# Altium PCB PCB1.PcbDoc
Units mil, origin at the board's own origin, x right, y up, seen from the top; angles counter-clockwise.
Board outline 6000 x 4000 mil, 2 copper layers (Top Layer, Bottom Layer); 11 components, 6 nets, 30 pads, 0 vias.
Unrouted connection lines stored in the file: 22.
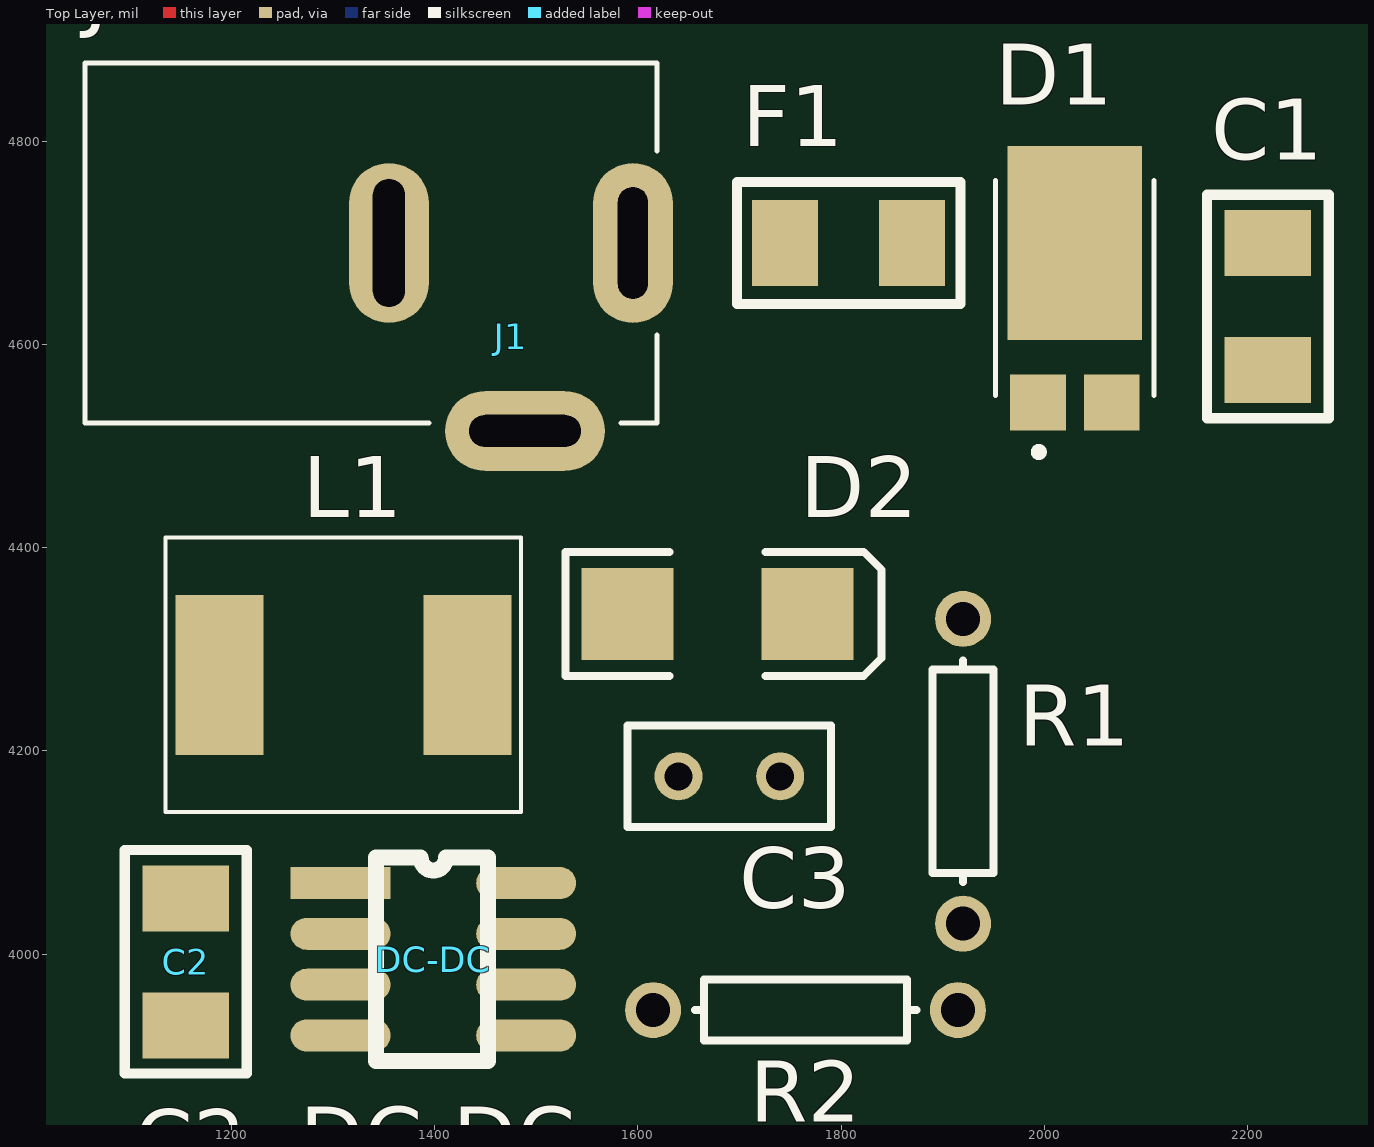
[diagram p0: Top Layer view]
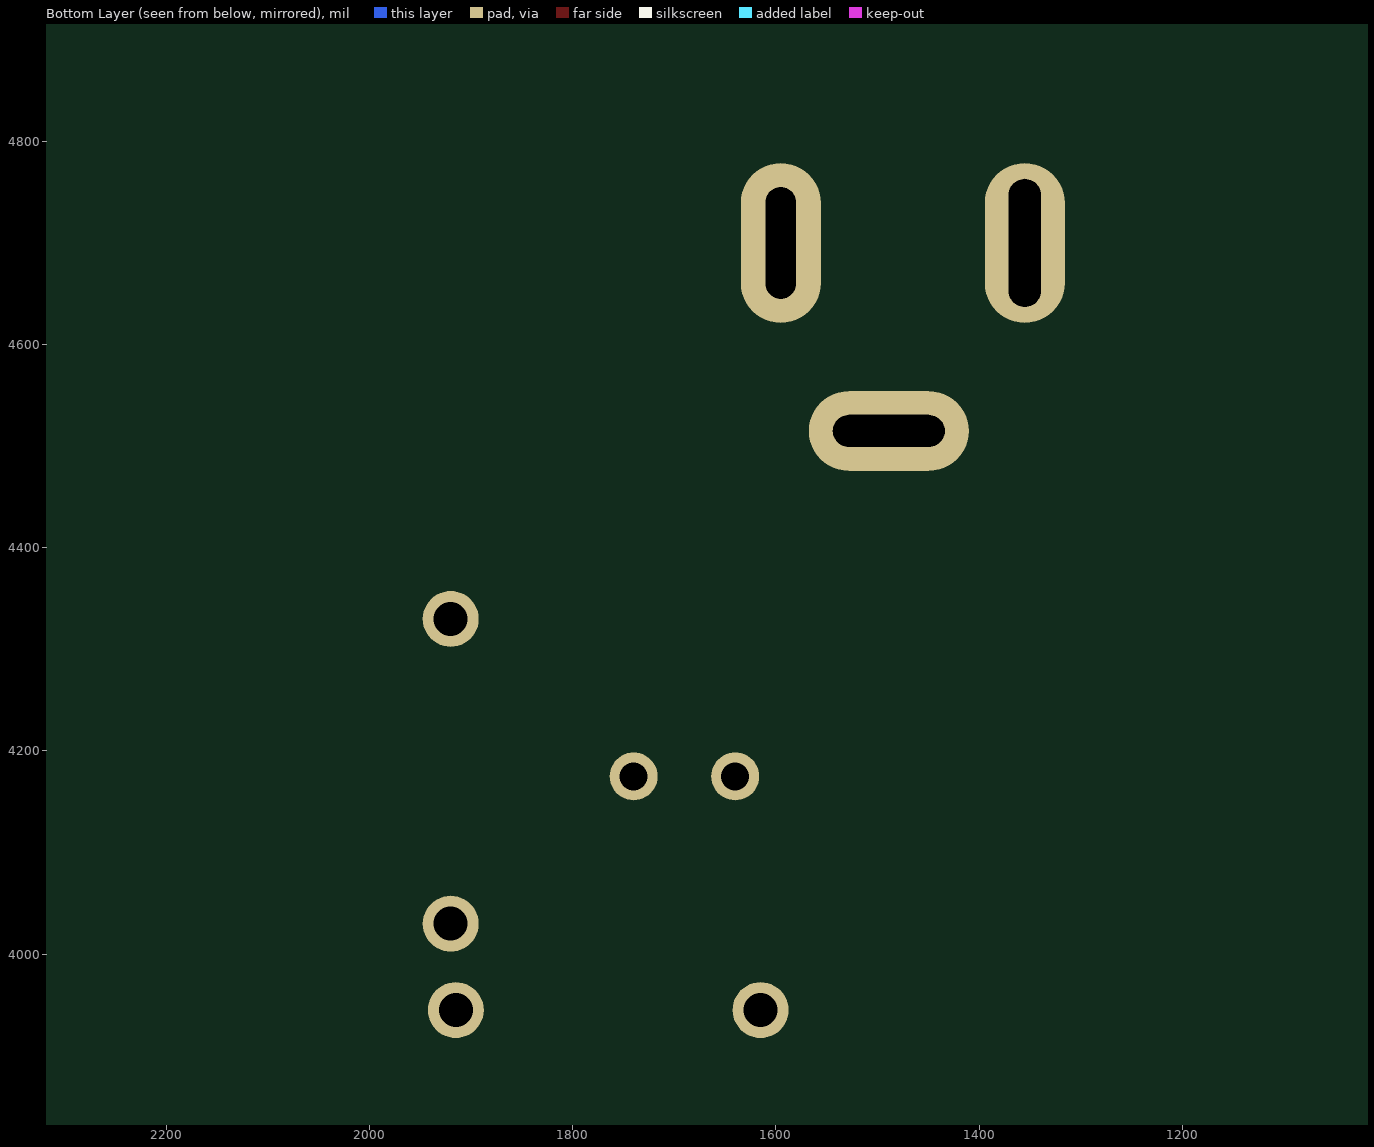
[diagram p1: Bottom Layer view, seen from below]

## Layer stack, top to bottom
Top Solder: solder mask 0.4, Solder Resist, Dk 3.5
Top Layer: signal copper 1.4
Dielectric 1: dielectric 12.6, FR-4, Dk 4.8
Bottom Layer: signal copper 1.4
Bottom Solder: solder mask 0.4, Solder Resist, Dk 3.5

## Board outline
1000,1000 7000,1000 7000,5000 1000,5000

## Design rules (kind name [scope] priority, off if disabled: settings)
Clearance [All] p1: gap=10 ignorepadtopadclearanceinfootprint=FALSE except(0: Arc-Hole Track-Hole SMDPad-Hole THPad-Hole Via-Hole Fill-Hole Poly-Hole Region-Hole Text-Hole)
PolygonConnect [All] p1: connectstyle=Relief reliefconductorwidth=10 reliefentries=4 polygonreliefangle="90 Angle" airgapwidth=10
RoutingVias [All] p1: holewidth=28 width=50 viastyle="Through Hole" minholewidth=28 minwidth=50 maxholewidth=28 maxwidth=50
SolderMaskExpansion [All] p1: expansion=4
Width Width_1 [(InNet('27V') OR InNet('GND') OR InNet('VCC'))] p1: maxlimit=35 minlimit=15 preferedwidth=25 minimp=50.000000 maximp=50.000000 favimp=50.000000
Width [All] p2: maxlimit=10 minlimit=10 preferedwidth=10
30 further rules are at their usual default settings.

## Components (designator, comment, footprint, x,y, rotation, side; value= is the part's Value field where it differs from the comment)
C1 "Cap" 1206 2220,4637.5 r90 top value=47uF
C2 "Cap" 1206 1155,3992.5 r90 top value=47uF
C3 "Leaded Cap" RAD-0.1 1690,4175 r0 top value=100pF
D1 "Diode" PowerDi5 2030,4655.67 r0 top
D2 "Schottky" SMB 1678.58,4335 r0 top
DC-DC "XL6001E1" SOP8 1307.32,4070 r0 top
F1 "SMD Fuse" 1206 1807.5,4700 r0 top
J1 "DC-005" NINIGI_DC-005 1488.86,4700 r0 top
L1 "BCIHP0730" 7x7 1310,4275 r0 top (schematic designator L)
R1 "Res1" AXIAL-0.3 1920,4180 r90 top value=150K
R2 "Res1" AXIAL-0.3 1765,3945 r0 top value=1.2K

## Footprints (in the part's own frame and the unit in brackets; to place one, negate y for a bottom-side part, rotate by r counter-clockwise, add the part's x,y. Pads: shape width x height; smd on the part's side, far side on the other; paste and mask are expansions set on the pad)
7x7 [mm]
  rect 2.2x4 smd: 1(-3.1,0) 2(3.1,0)
  silkscreen extent -4.44,-3.43 4.44,3.43
1206 [mil]
  rect 65x85 smd: 1(-62.5,0) 2(62.5,0)
  silkscreen extent -110,-60 110,60
AXIAL-0.3 [mm] "Axial Device, Thru-Hole; 2 Leads; 0.3 in Pin Spacing"
  round 1.4 hole 0.85: 1(-3.81,0) 2(3.81,0)
  silkscreen extent -2.77,-0.76 2.77,0.76
NINIGI_DC-005 [mm]
  oval 2x4 hole 0.75 slot 2.794 at 90 deg: 2(2.7,0)
  oval 4x2 hole 0.8 slot 2.794 at 0 deg: 4(0,-4.7)
  oval 2x4 hole 0.801 slot 3.2 at 90 deg: 5(-3.4,0)
  silkscreen extent -11,-4.5 3.3,4.5
PowerDi5 [mm]
  rect 1.39x1.4 smd: 1(-0.92,-2.856) 2(0.92,-2.856)
  rect 3.36x4.86 smd: 3(0,1.126)
  silkscreen extent -1.98,-4.2 1.98,2.69
RAD-0.1 [mm] "Radial Cap, Thru-Hole; 2 Leads; 0.1 in Pin Spacing"
  round 1.2 hole 0.7: 1(-1.27,0) 2(1.27,0)
  silkscreen extent -2.54,-1.27 2.54,1.27
SMB [mm] "DO-214-AA/SMB; 2 C-Bend Leads; Body 5.3 x 3.6 mm, inc. leads (LxW)"
  rect 2.3x2.3 smd: 1(-2.25,0) 2(2.25,0)
  silkscreen extent -3.8,-1.55 4.1,1.55
SOP8 [mm]
  rect 2.5x0.8 smd: 1(0,0)
  oval 2.5x0.8 smd: 2(0,-1.27) 3(0,-2.54) 4(0,-3.81) 5(4.64,-3.81) 6(4.64,-2.54) 7(4.64,-1.27) 8(4.64,0)
  silkscreen extent 0.89,-4.44 3.68,0.64

## Part data
D2: library part "D Schottky", "Schottky Diode", Code_JEDEC=DO-214-AA, LatestRevisionDate=17-Jul-2002, LatestRevisionNote="Re-released for DXP Platform.", PackageDescription="DO-214-AA/SMB; 2 C-Bend Leads; Body 5.3 x 3.6 mm, inc. leads (LxW)", PackageReference=SMB, Published=8-Jun-2000, Publisher="Altium Limited"
J1: Package=None, Availability=Unavailable, MF="Best Inc.", MP=DC-005, Price=None, SnapEDA_Link=https://www.snapeda.com/parts/DC-005/Best%20Inc./view-part/?ref=snap
R1 R2: "Resistor", LatestRevisionDate=17-Jul-2002, LatestRevisionNote="Re-released for DXP Platform.", PackageDescription="Axial Device, Thru-Hole; 2 Leads; 0.3 in Pin Spacing", PackageReference=AXIAL-0.3, Published=8-Jun-2000, Publisher="Altium Limited"
C1 C2 C3: LatestRevisionDate=17-Jul-2002, LatestRevisionNote="Re-released for DXP Platform.", PackageDescription="Radial Cap, Thru-Hole; 2 Leads; 0.3 in Pin Spacing", PackageReference=RAD-0.3, Published=8-Jun-2000, Publisher="Altium Limited"
D1: Code_JEDEC=DO-214-AB, LatestRevisionDate=17-Jul-2002, LatestRevisionNote="Re-released for DXP Platform.", PackageDescription="DO-214-AB/SMC; 2 C-Bend Leads; Body 7.9 x 5.9 mm, inc. leads (LxW)", PackageReference=SMC, PackageVersion=Sep-1996, Published=8-Jun-2000, Publisher="Altium Limited"

## Nets (pads, with @x,y where several pads share a name; then routed paths per layer and width w, separated by ;. In a path a pad name is that pad's centre, name@x,y a point inside that pad or via, vN(x,y) a via of type N, cw(c..) or ccw(c..) an arc to the next point about the centre after c; other vN are vias at no path point)
27V: C3.2 D2.2 R1.2
GND: C1.1 C2.1 C3.1 D1.1 D1.2 DC-DC.7 DC-DC.8 J1.5 R2.1
NetD2_1: D2.1 DC-DC.5 DC-DC.6 L1.2
NetDC-DC_3: DC-DC.3 R1.1 R2.2
NetF1_1: F1.1 J1.2
VCC: C1.2 C2.2 D1.3 DC-DC.1 DC-DC.2 F1.2 L1.1
pads on no net: DC-DC.4 J1.4